# EAGLE board 4081_3 (EAGLE 5.06)
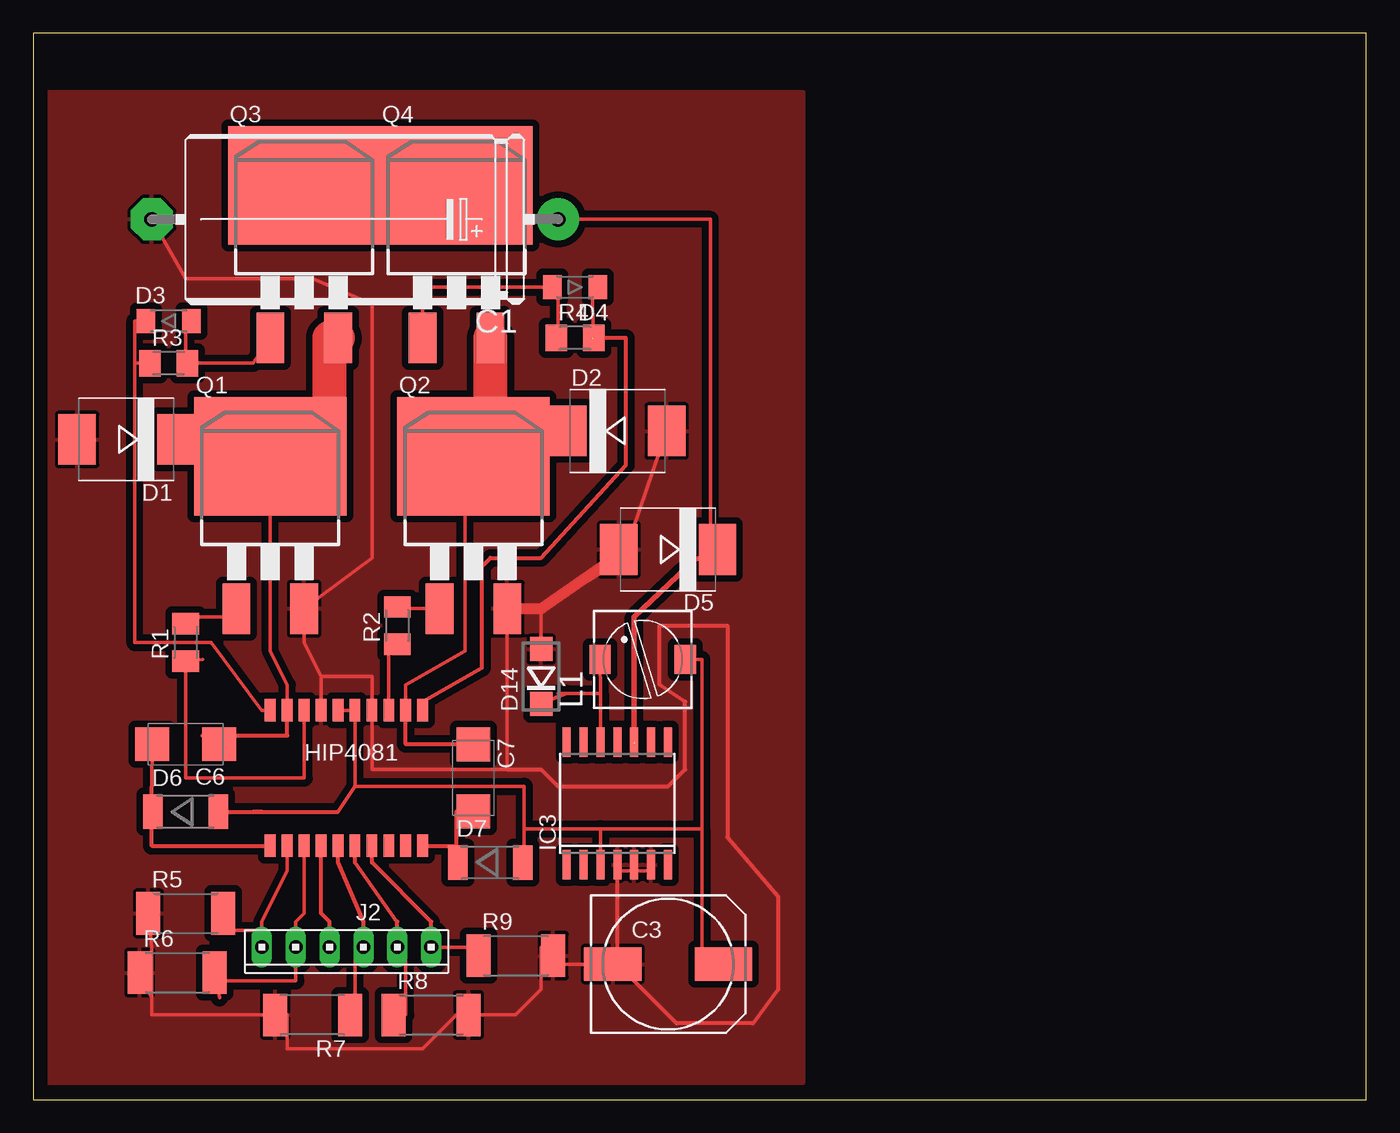
[diagram p0: board, top side]

Size 100 x 80 mm. Coordinates in mm from the lower left corner, seen from the top.
Outline: 0,0 100,0 100,80 0,80 0,0
Copper layers (1*16): Top 0.035mm / dielectric 1.5mm / Bottom 0.035mm
Design rules "default *": minimum track width 10mil, minimum drill 24mil, track to track 20mil, track to pad 20mil, pad to pad 8mil, via to via 8mil, smd to smd 8mil, copper to edge 40mil, drill to drill 8mil, minimum pad ring 10mil, minimum via ring 8mil, stop-mask expansion 4mil, vias tented up to drill 0mil, thermal gap 10mil

## Footprints (pad centres in the part's own frame; a part is rotated, then mirrored left to right if it is on the bottom)
E30-12 = drill 1.118 pad 3.15 round: + -15.24,0 | drill 1.118 pad 3.15 octagon: - 15.24,0
140CLH-1010 = smd 4.3 x 2.5: + 4.15,0; - -4.15,0
C/6032-28R = smd 2.55 x 2.5: + 2.525,0; - -2.525,0
SMC = smd 2.8 x 3.8: A 3.7,0; C -3.7,0
MELF-MLL34 = smd 1.4 x 1.8: 1 -1.7,0; 2 1.7,0
SOD87 = smd 1.45 x 2.6: 1 -2.445,0; 2 2.445,0
DO214BA = smd 1.8 x 1.7: A 2.05,0; C -2.05,0
20-SOIC = smd 0.813 x 1.676: 1 -5.08,-5.08; 2 -3.81,-5.08; 3 -2.54,-5.08; 4 -1.27,-5.08; 5 0,-5.08; 6 1.27,-5.08; 7 2.54,-5.08; 8 3.81,-5.08; 9 5.08,-5.08; 10 6.35,-5.08; 11 6.35,5.08; 12 5.08,5.08; 13 3.81,5.08; 14 2.54,5.08; 15 1.27,5.08; 16 0,5.08; 17 -1.27,5.08; 18 -2.54,5.08; 19 -3.81,5.08; 20 -5.08,5.08
SO14W = smd 0.6 x 2.2: 1 -3.81,-4.6; 2 -2.54,-4.6; 3 -1.27,-4.6; 4 0,-4.6; 5 1.27,-4.6; 6 2.54,-4.6; 7 3.81,-4.6; 8 3.81,4.6; 9 2.54,4.6; 10 1.27,4.6; 11 0,4.6; 12 -1.27,4.6; 13 -2.54,4.6; 14 -3.81,4.6
10X06MTA = drill 1.016 long: 1 6.35,0; 2 3.81,0; 3 1.27,0; 4 -1.27,0; 5 -3.81,0; 6 -6.35,0
PIS2816 = smd 2.2 x 1.6: 1 0,3.2; 2 0,-3.2
D2PACK = smd 2.083 x 3.81: 1 -2.54,-8.89; 3 2.54,-8.89 | smd 11.43 x 8.89: 2 0,2.54
M1206 = smd 1.6 x 2: 1 -1.4,0; 2 1.4,0
R2512 = smd 1.8 x 3.2: 1 -2.8,0; 2 2.8,0

## Placement (x,y rotation side)
C1  [E30-12]  24.13,66.04 180 top
C3  [140CLH-1010]  47.62,10.16 0 top
C6  [C/6032-28R]  11.43,26.67 180 top
C7  [C/6032-28R]  33.02,24.13 270 top
D1  [SMC]  6.99,49.53 180 top
D2  [SMC]  43.81,50.16 0 top
D3  [MELF-MLL34]  10.16,58.42 0 top
D4  [MELF-MLL34]  40.64,60.96 180 top
D5  [SMC]  47.62,41.27 180 top
D6  [SOD87]  11.43,21.59 0 top
D7  [SOD87]  34.29,17.78 0 top
D14  [DO214BA]  38.1,31.75 90 top
IC2  HIP4081_SMD  [20-SOIC]  22.86,24.13 0 top
IC3  LM2574HVM-12  [SO14W]  43.81,22.23 0 top
J2  [10X06MTA]  23.5,11.43 180 top
L1  [PIS2816]  45.72,33.02 90 top
Q1  IRF3704S  [D2PACK]  17.78,45.72 0 top
Q2  IRF3704S  [D2PACK]  33.02,45.72 0 top
Q3  IRF3704S  [D2PACK]  20.32,66.04 0 top
Q4  IRF3704S  [D2PACK]  31.75,66.04 0 top
R1  [M1206]  11.43,34.29 90 top
R2  [M1206]  27.3,35.56 90 top
R3  [M1206]  10.16,55.24 0 top
R4  [M1206]  40.64,57.15 0 top
R5  [R2512]  11.43,13.97 0 top
R6  [R2512]  10.79,9.53 0 top
R7  [R2512]  20.95,6.35 180 top
R8  [R2512]  29.84,6.35 0 top
R9  [R2512]  36.2,10.79 0 top

## Library data of the parts
C1 C3 C6 C7 L1 R1-R9 = rcl
D1 D2 D5 D14 = diode
D3 D4 D6 D7 = semicon-smd-ipc
IC2 = A-JD3
IC3 = linear
J2 = con-amp
Q1-Q4 = transistor-power

## Nets
+12V: C3.+ D6.2 D7.2 IC2.15 IC2.16 IC3.3 L1.2
AHO2: D4.1 IC2.11 R4.2
AHS2: C7.- D2.C IC2.12 Q2.2 Q4.3
ALO2: IC2.13 R2.1
ALS2: Q3.2 Q4.2
BHO2: D3.1 IC2.20 R3.1
BHS2: C6.- D1.C IC2.19 Q1.2 Q3.3
BLO2: IC2.18 R1.1
GND: C1.- C3.- D1.A D2.A D5.A D14.A IC2.14 IC2.17 IC3.4 IC3.5 IC3.6 Q1.3 Q2.3 R5.1 R6.1 R7.2 R8.2 R9.2
N$1: D14.C IC3.12 L1.1
N$2: Q1.1 R1.2
N$3: Q2.1 R2.2
N$4: D4.2 Q4.1 R4.1
N$5: D3.2 Q3.1 R3.2
N$6: IC2.4 J2.3
N$7: C6.+ D6.1 IC2.1
N$9: C7.+ D7.1 IC2.10
N$16: IC2.2 J2.1 R5.2
N$17: IC2.3 J2.2 R6.2
N$19: IC2.5 J2.4 R7.1
N$20: IC2.6 J2.5 R8.1
N$21: IC2.7 J2.6 R9.1
V+: C1.+ D5.C IC3.10

## Tracks (layer width: path | path; a pad name or v marks a point on that pad's centre or on a via)
+12V
  Top 0.254: IC2.16 IC2.15 24.13,23.5 36.83,23.5 36.83,20.32 | 36.83,20.32 36.83,17.78 D7.2 | 36.83,20.32 42.55,20.32 | 42.55,20.32 IC3.3 | 42.55,20.32 50.16,20.32 | 50.16,20.32 50.16,33.02 L1.2 | 50.16,20.32 50.16,10.16 C3.+ | D6.2 14.61,21.59
  Top 0.305: 14.61,21.59 17.14,21.59 | 17.14,21.59 16.51,21.59 | 17.14,21.59 22.86,21.59 24.13,23.5
AHO2  (1 unrouted)
  Top 0.254: R4.2 41.91,60.96 D4.1
  Top 0.305: IC2.11 29.21,29.84 33.66,32.38 33.66,40.01 34.29,40.64 38.1,40.64 44.45,47.62 44.45,57.15 41.91,57.15
AHS2
  Top 0.254: IC2.12 27.94,31.11 32.38,33.66 32.38,45.09 | 32.38,45.09 36.83,48.26 D2.C | 32.38,45.09 Q2.2 34.29,50.16 | 33.02,26.67 C7.-
  Top 0.305: IC2.12 27.94,26.67 33.02,26.67
  Top 2.54: 34.29,50.16 Q4.3
ALO2
  Top 0.254: IC2.13 26.67,34.16 R2.1 26.67,34.29
ALS2
  Top 2.54: Q3.2 Q4.2
BHO2
  Top 0.254: IC2.20 17.14,29.21 13.34,34.29 7.62,34.29 7.62,55.24 | 7.62,55.24 7.62,58.42 D3.1 | 7.62,55.24 R3.1
BHS2
  Top 0.254: IC2.19 19.05,31.11 17.78,33.66 Q1.2 19.05,49.53 | 19.05,49.53 16.51,48.26 D1.C | 19.05,49.53 20.95,50.8 | C6.- 12.7,27.3
  Top 0.305: IC2.19 19.05,27.3 12.7,27.3
  Top 2.54: 20.95,50.8 22.23,52.07 22.23,57.15 Q3.3
BLO2
  Top 0.254: IC2.18 20.32,24.13 11.43,24.13 R1.1 12.7,33.02
GND
  Top 0.254: 21.59,31.75 20.32,34.29 Q1.3 25.4,40.64 25.4,59.69 20.95,61.59 11.43,61.59 C1.- | IC2.17 21.59,31.75 | 21.59,31.75 25.4,31.75 IC2.14 25.4,24.77 35.56,24.77 Q2.3 | 45.09,17.14 43.81,17.14 IC3.4 | 45.09,17.14 46.35,17.14 IC3.6 | 45.09,17.14 IC3.5 | D14.A 38.1,36.83 44.45,40.64 D5.A | 44.45,41.27 D2.A | 8.89,7.62 8.89,11.43 R5.1 8.89,12.7 | 8.89,7.62 R6.1 | 8.89,7.62 8.89,6.35 R7.2 19.05,6.35 19.05,3.81 29.21,3.81 31.75,6.35 R8.2 36.2,6.35 38.1,8.26 38.1,11.43 R9.2 39.37,10.16 C3.-
  Top 0.305: 35.56,24.77 38.1,24.77 39.37,23.5 47.62,23.5 48.9,24.77 48.9,29.84 46.99,31.11 46.99,35.56 52.07,35.56 52.07,19.68 55.88,15.24 55.88,8.26 53.98,5.71 48.26,5.71 43.81,10.16 43.81,17.14
  Top 0.813: Q2.3 38.1,36.83 44.45,41.27
  pour Top: 0.64,75.56 0.64,1.27 57.78,1.27 57.78,75.56
N$1
  Top 0.254: 42.55,30.48 40.01,30.48 D14.C 39.52,30.34 39.37,30.48 42.55,30.48 | 42.55,30.48 IC3.12 | 42.55,30.48 L1.1
N$2
  Top 0.254: Q1.1 15.24,36.2 11.43,36.2 R1.2
N$3
  Top 0.254: Q2.1 27.94,36.83 R2.2
N$4
  Top 0.254: R4.1 39.37,57.15 39.37,60.96 D4.2 29.21,60.96 Q4.1
N$5
  Top 0.254: 11.43,57.78 11.43,55.24 | 11.43,57.78 D3.2 11.43,58.42 11.43,57.78 | Q3.1 16.51,55.24 R3.2 11.43,55.88 11.43,57.78
N$6
  Top 0.305: IC2.4 21.59,13.97 22.23,13.34 J2.3
N$7
  Top 0.254: 8.89,23.5 C6.+ | 8.89,21.59 D6.1
  Top 0.305: IC2.1 8.89,19.05 8.89,21.59 8.89,23.5
N$9
  Top 0.254: 33.02,21.59 C7.+ | 31.75,17.78 D7.1
  Top 0.305: 33.02,21.59 31.75,21.59 31.75,19.05 | 31.75,19.05 31.75,17.78 | IC2.10 31.75,19.05
N$16
  Top 0.254: 17.14,12.7 J2.1 | 17.14,12.7 17.14,13.34 19.05,17.14 IC2.2 | 17.14,12.7 13.97,12.7 R5.2
N$17
  Top 0.254: IC2.3 20.32,13.97 19.68,13.34 J2.2 19.68,8.89 13.34,8.89 R6.2 13.97,7.62
N$19
  Top 0.254: R7.1 24.13,6.35 24.13,11.43 J2.4
  Top 0.305: IC2.5 22.86,17.78 24.77,13.34 J2.4
N$20
  Top 0.254: R8.1 27.94,6.35 27.94,11.43 J2.5
  Top 0.305: IC2.6 24.13,17.78 27.3,13.34 J2.5
N$21
  Top 0.254: R9.1 33.02,11.43 J2.6
  Top 0.305: IC2.7 25.4,17.78 29.84,13.34 J2.6
V+  (1 unrouted)
  Top 0.254: 51.44,40.64 D5.C 50.8,41.27 50.8,66.04 C1.+
  Top 0.305: C1.+ 34.92,66.04
  Top 0.406: 45.09,26.67 45.09,36.2 49.68,40.54 51.44,40.64